# EAGLE board task_3 (EAGLE 9.5.2)
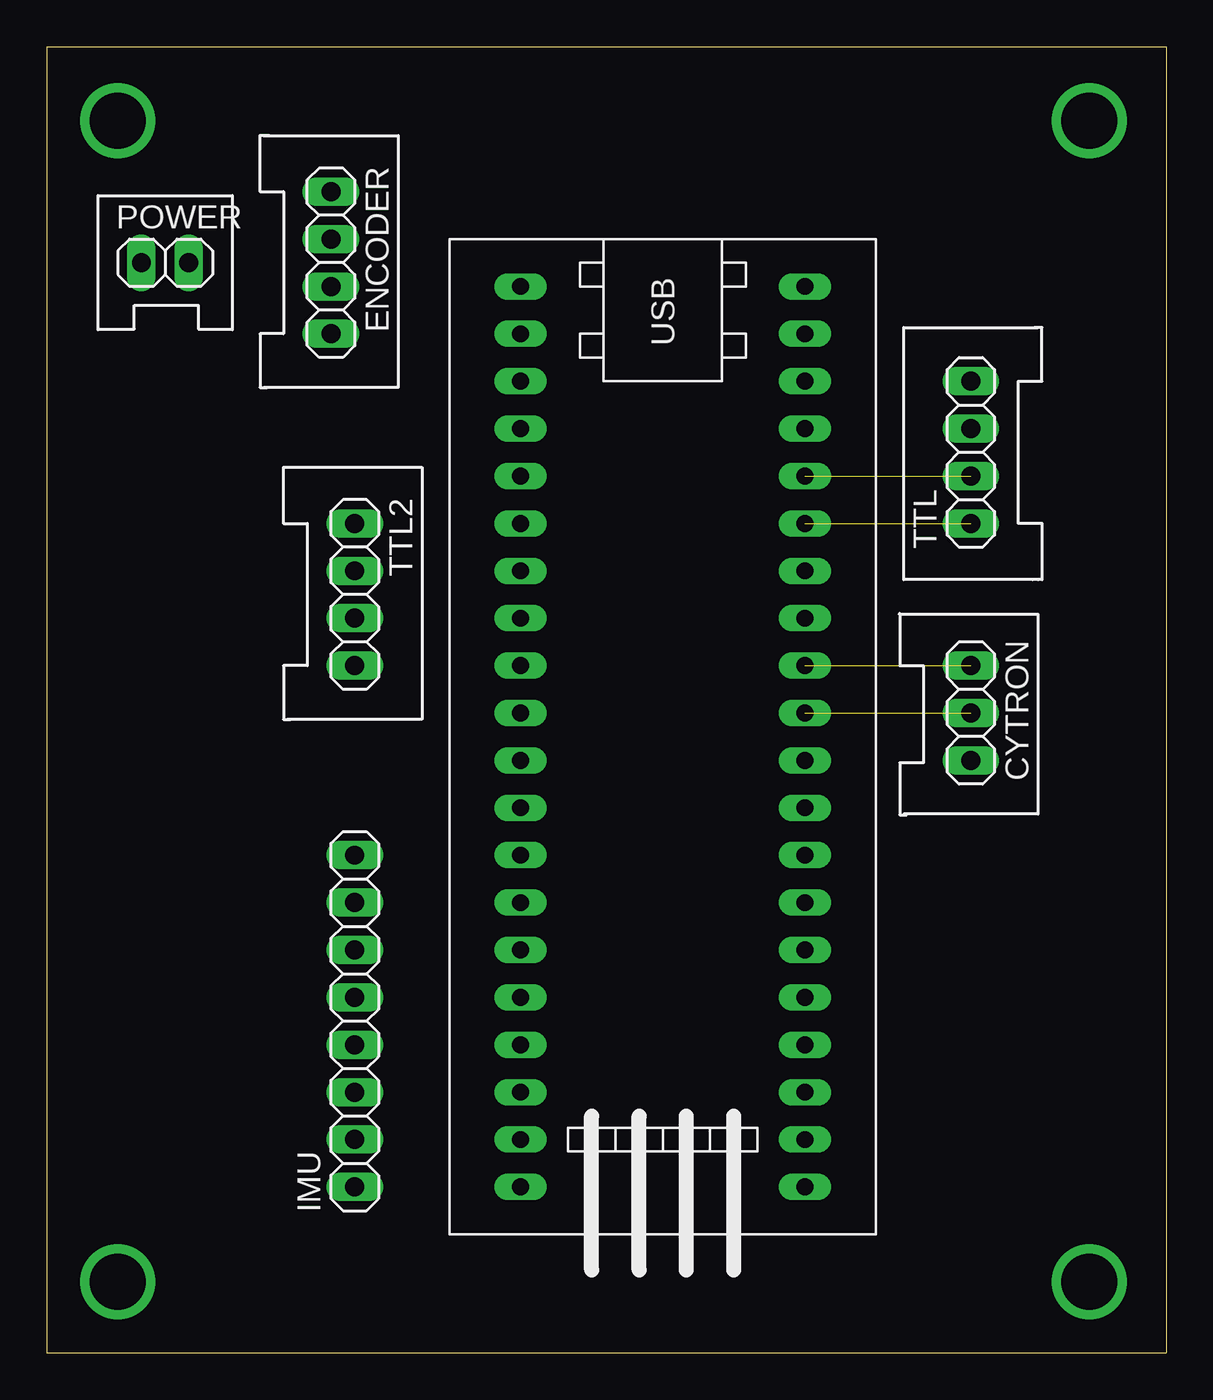
[diagram p0: board, top side]
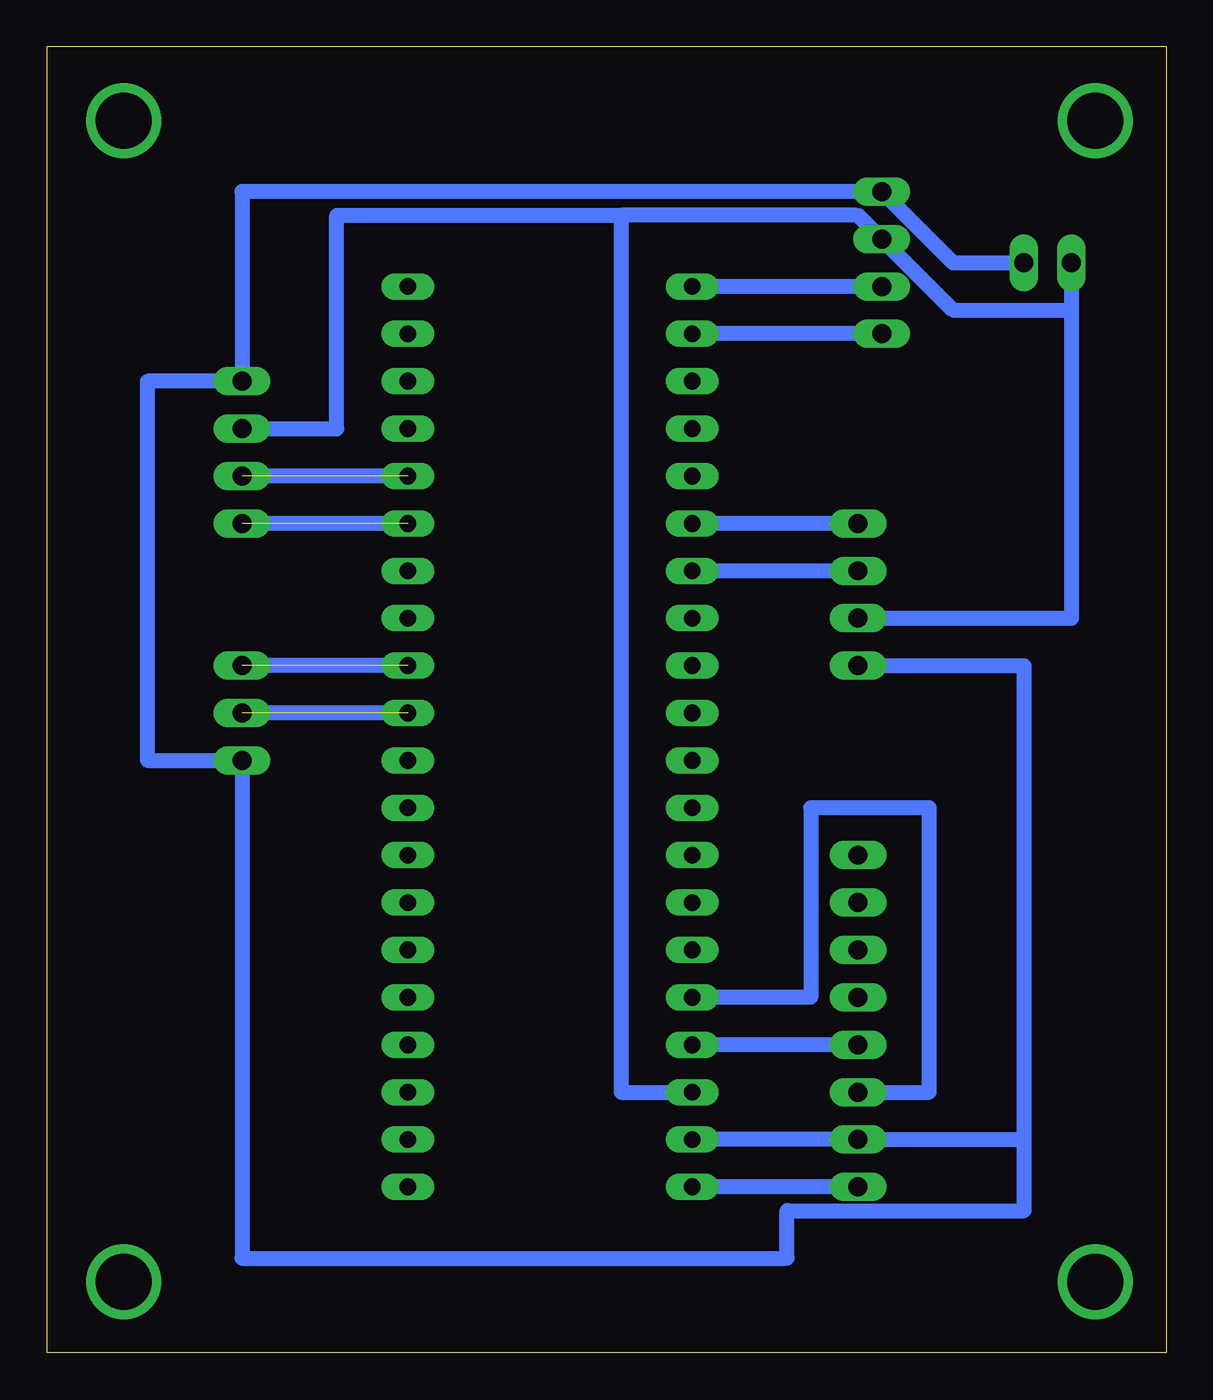
[diagram p1: board, bottom side, seen from below]

Size 60 x 70 mm. Coordinates in mm from the lower left corner, seen from the top.
Outline: 0,0 60,0 60,70 0,70 0,0
Copper layers (1*16): Top 0.035mm / dielectric 1.5mm / Bottom 0.035mm
Design rules "default": minimum track width 6mil, minimum drill 0.35mm, track to track 6mil, track to pad 6mil, pad to pad 6mil, via to via 6mil, smd to smd 6mil, copper to edge 40mil, drill to drill 6mil, minimum pad ring 10mil, minimum via ring 8mil, stop-mask expansion 4mil, vias tented up to drill 0mil, thermal gap 10mil

## Footprints (pad centres in the part's own frame; a part is rotated, then mirrored left to right if it is on the bottom)
1X03_DATA = drill 1.016 long: 1 -2.54,0; 2 0,0; 3 2.54,0
1X04_DATA = drill 1.016 long: 1 -3.81,0; 2 -1.27,0; 3 1.27,0; 4 3.81,0
1X08 = drill 1.016 long: 1 -8.89,0; 2 -6.35,0; 3 -3.81,0; 4 -1.27,0; 5 1.27,0; 6 3.81,0; 7 6.35,0; 8 8.89,0
1X02_DATA = drill 1.016 long: 1 -1.27,0; 2 1.27,0
STM32F103C8T6-MODULE = drill 0.9 long: 3.3V_1 25.4,-7.62; 3.3V_2 -17.78,7.62; 5V 20.32,-7.62; GND_1 22.86,-7.62; GND_2 -20.32,7.62; GND_3 -22.86,7.62; PA_0 15.24,7.62; PA_1 12.7,7.62; PA_2 10.16,7.62; PA_3 7.62,7.62; PA_4 5.08,7.62; PA_5 2.54,7.62; PA_6 0,7.62; PA_7 -2.54,7.62; PA_8 -12.7,-7.62; PA_9 -10.16,-7.62; PA_10 -7.62,-7.62; PA_11 -5.08,-7.62; PA_12 -2.54,-7.62; PA_15 0,-7.62; PB_0 -5.08,7.62; PB_1 -7.62,7.62; PB_3 2.54,-7.62; PB_4 5.08,-7.62; PB_5 7.62,-7.62; PB_6 10.16,-7.62; PB_7 12.7,-7.62; PB_8 15.24,-7.62; PB_9 17.78,-7.62; PB_10 -10.16,7.62; PB_11 -12.7,7.62; PB_12 -22.86,-7.62; PB_13 -20.32,-7.62; PB_14 -17.78,-7.62; PB_15 -15.24,-7.62; PC_13 22.86,7.62; PC_14 20.32,7.62; PC_15 17.78,7.62; RESET -15.24,7.62; VB 25.4,7.62

## Placement (x,y rotation side)
CYTRON  [1X03_DATA]  49.53,34.29 270 top
ENCODER  [1X04_DATA]  15.24,58.42 270 top
IMU  [1X08]  16.51,17.78 90 top
POWER  [1X02_DATA]  6.35,58.42 0 top
TTL  [1X04_DATA]  49.53,48.26 90 top
TTL2  [1X04_DATA]  16.51,40.64 270 top
U$1  STM32F103C8T6-MODULE  [STM32F103C8T6-MODULE]  33.02,34.29 270 top

## Library data of the parts
CYTRON ENCODER IMU POWER TTL TTL2 U$1 = MIA_LIBRARY-2-2-2

## Nets
3.3V@1: IMU.1 U$1.3.3V_1
3.3V@2: U$1.3.3V_2
5V: ENCODER.2 POWER.1 TTL2.3 TTL.3 U$1.5V
GND: CYTRON.3 ENCODER.1 IMU.2 POWER.2 TTL2.4 TTL.4 U$1.GND_1
GND1: U$1.GND_2
GND2: U$1.GND_3
PA_0: U$1.PA_0
PA_1: U$1.PA_1
PA_2: U$1.PA_2
PA_3: U$1.PA_3
PA_4: U$1.PA_4
PA_5: U$1.PA_5
PA_6: CYTRON.2 U$1.PA_6
PA_7: CYTRON.1 U$1.PA_7
PA_8: U$1.PA_8
PA_9: TTL2.1 U$1.PA_9
PA_10: TTL2.2 U$1.PA_10
PA_11: U$1.PA_11
PA_12: U$1.PA_12
PA_15: U$1.PA_15
PB_0: U$1.PB_0
PB_1: U$1.PB_1
PB_3: U$1.PB_3
PB_4: U$1.PB_4
PB_5: U$1.PB_5
PB_6: U$1.PB_6
PB_7: U$1.PB_7
PB_8: IMU.3 U$1.PB_8
PB_9: IMU.4 U$1.PB_9
PB_10: TTL.1 U$1.PB_10
PB_11: TTL.2 U$1.PB_11
PB_12: ENCODER.3 U$1.PB_12
PB_13: ENCODER.4 U$1.PB_13
PB_14: U$1.PB_14
PB_15: U$1.PB_15
PC_13: U$1.PC_13
PC_14: U$1.PC_14
PC_15: U$1.PC_15
RESET: U$1.RESET
VB: U$1.VB

## Tracks (layer width: path | path; a pad name or v marks a point on that pad's centre or on a via)
3.3V@1
  Bottom 0.8: IMU.1 U$1.3.3V_1
5V
  Bottom 0.8: POWER.1 5.08,55.88 | 5.08,55.88 5.08,39.37 TTL2.3 | 5.08,55.88 11.43,55.88 ENCODER.2 16.47,60.92 16.55,60.92 16.59,60.96 29.21,60.96 | TTL.3 44.45,49.53 44.45,60.96 29.21,60.96 | 29.21,60.96 29.21,13.97 U$1.5V
GND
  Bottom 0.8: TTL2.4 7.62,36.83 7.62,11.43 | 7.62,11.43 7.62,7.62 20.32,7.62 20.32,5.08 49.53,5.08 CYTRON.3 54.61,31.75 54.61,52.07 TTL.4 49.53,62.23 ENCODER.1 11.43,58.42 POWER.2 | U$1.GND_1 IMU.2 7.62,11.43
N$3  (via drill 3)
  other vias: 3.81,3.81
N$4  (via drill 3)
  other vias: 55.88,3.81
N$5  (via drill 3)
  other vias: 55.88,66.04
N$6  (via drill 3)
  other vias: 3.81,66.04
PA_6  (1 unrouted)
  Bottom 0.8: U$1.PA_6 CYTRON.2
PA_7  (1 unrouted)
  Bottom 0.8: U$1.PA_7 CYTRON.1
PA_9
  Bottom 0.8: TTL2.1 U$1.PA_9
PA_10
  Bottom 0.8: TTL2.2 U$1.PA_10
PB_8
  Bottom 0.8: IMU.3 12.7,13.97 12.7,29.21 19.05,29.21 19.05,19.05 U$1.PB_8
PB_9
  Bottom 0.8: IMU.4 U$1.PB_9
PB_10  (1 unrouted)
  Bottom 0.8: U$1.PB_10 TTL.1
PB_11  (1 unrouted)
  Bottom 0.8: U$1.PB_11 TTL.2
PB_12
  Bottom 0.8: ENCODER.3 U$1.PB_12
PB_13
  Bottom 0.8: ENCODER.4 U$1.PB_13